# EAGLE board satshakitclsrichardfinal (EAGLE 7.5.0)
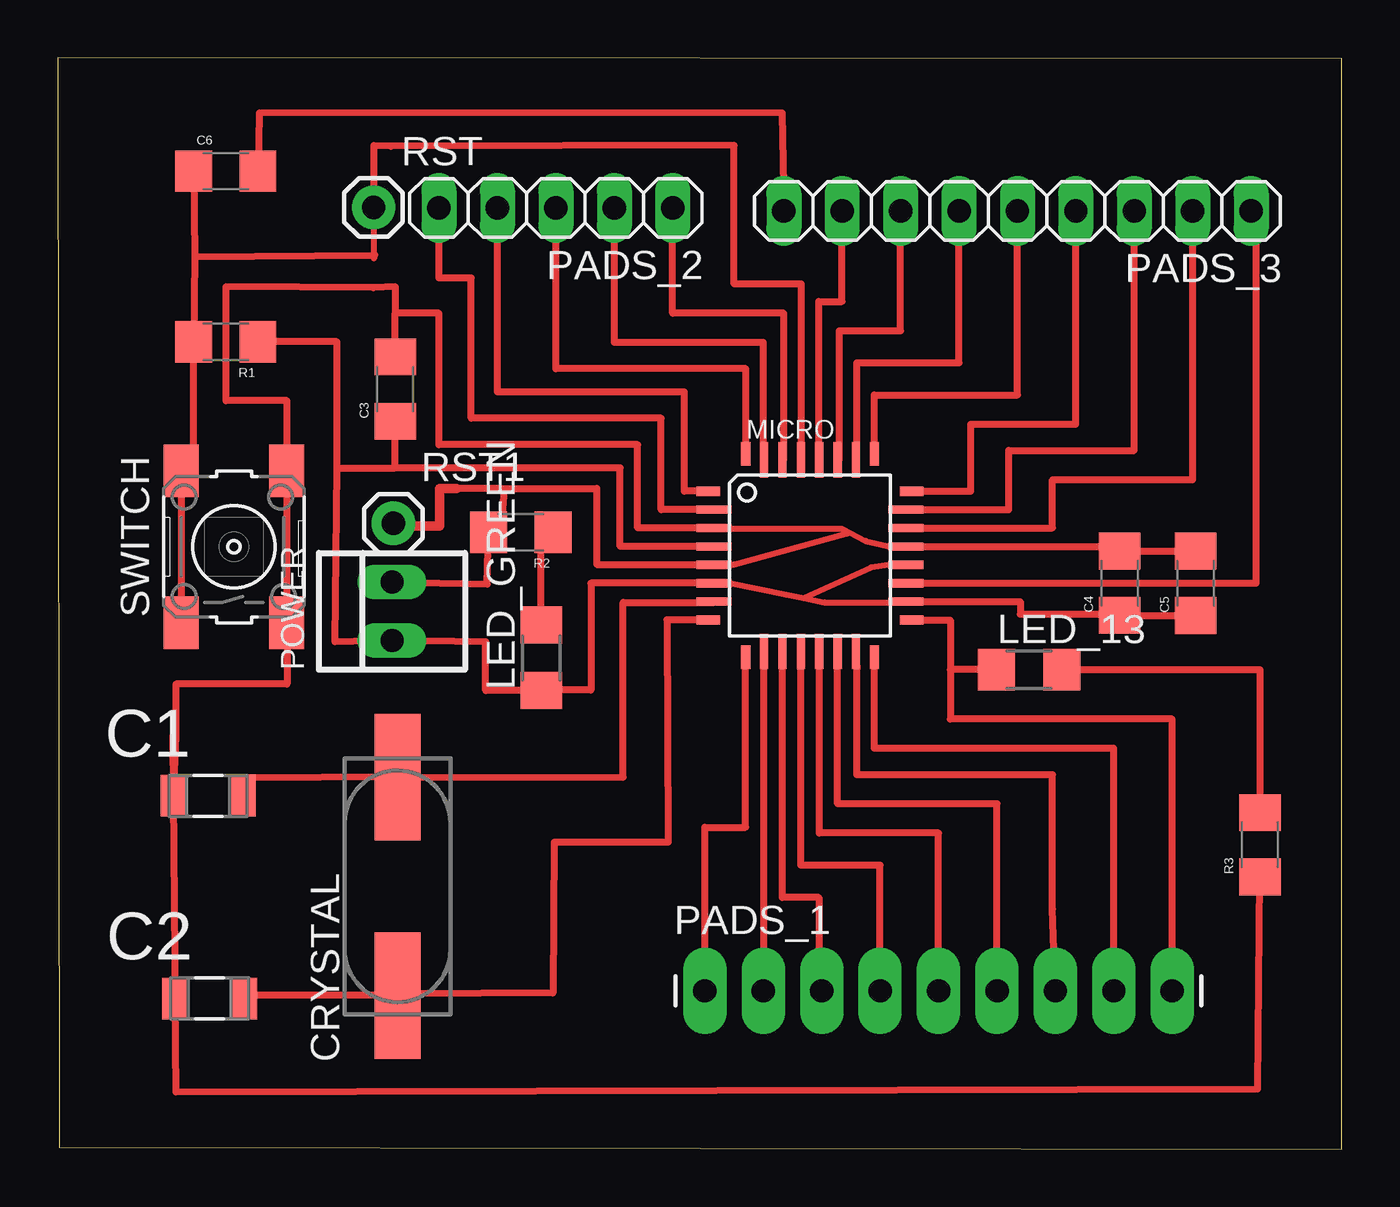
[diagram p0: board, top side]
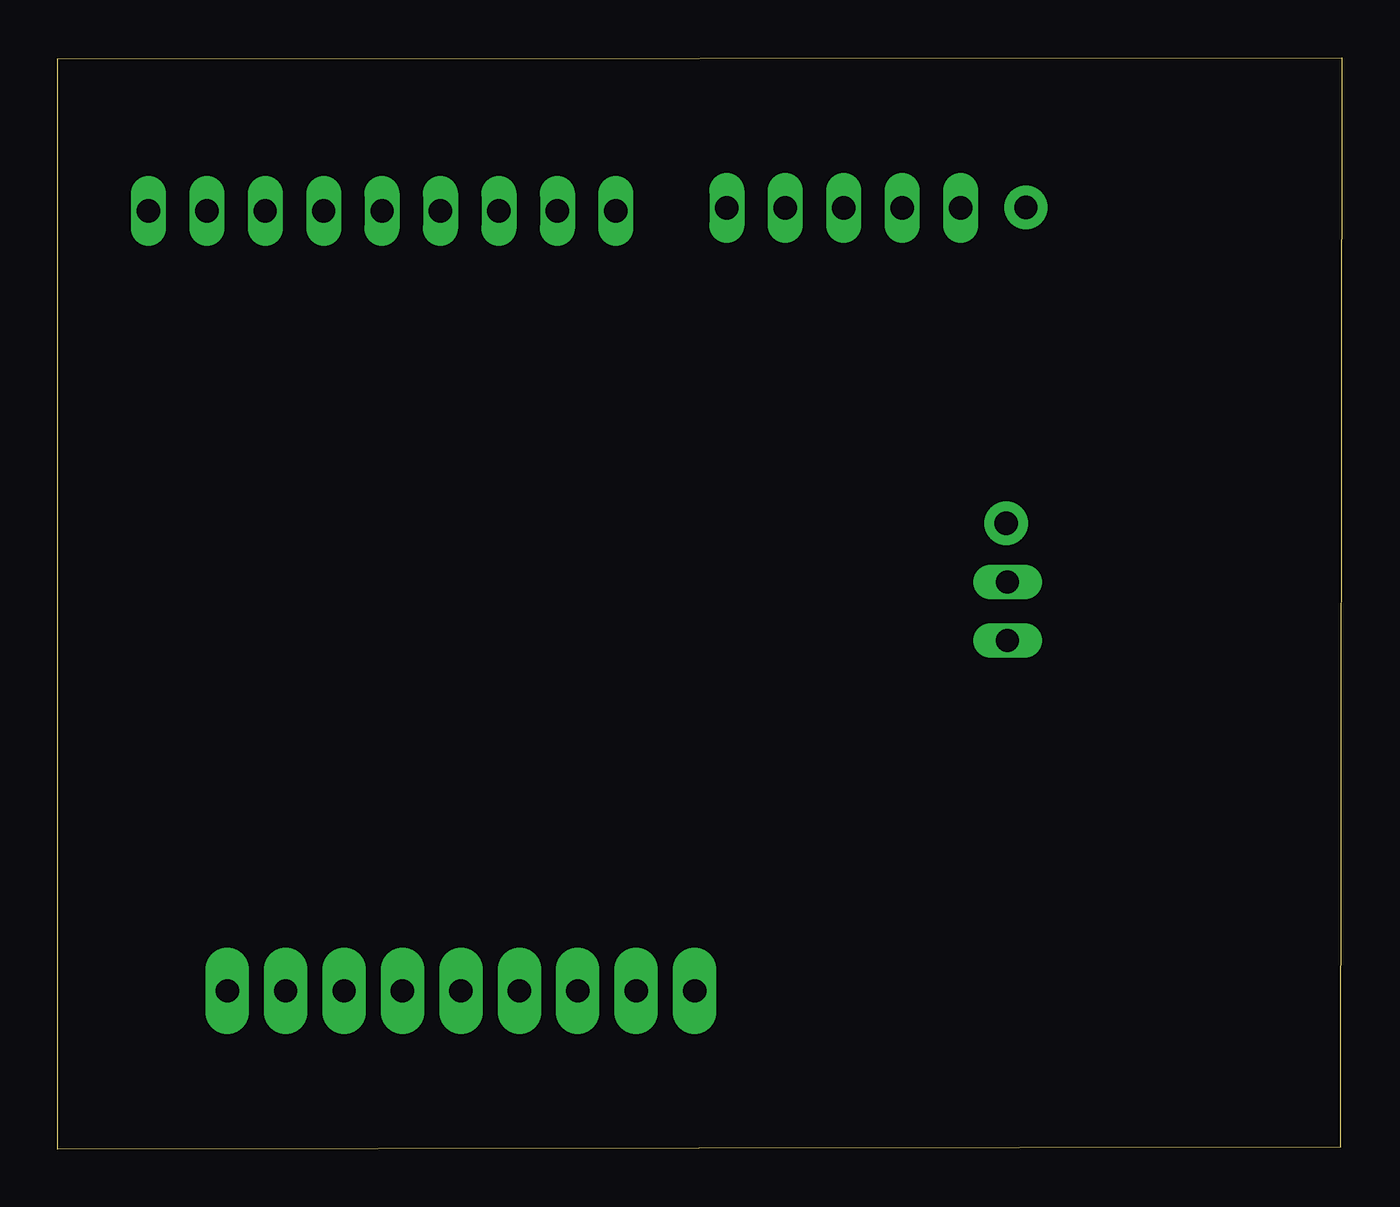
[diagram p1: board, bottom side, seen from below]

Size 55.84 x 47.48 mm. Coordinates in mm from the lower left corner, seen from the top.
Outline: 0.08,0.09 55.83,0 55.84,47.42 0,47.48 0.08,0.09
Copper layers (1*16): Top 0.035mm / dielectric 1.5mm / Bottom 0.035mm
Design rules "default": minimum track width 10mil, minimum drill 24mil, track to track 8mil, track to pad 8mil, pad to pad 8mil, via to via 8mil, smd to smd 8mil, copper to edge 40mil, drill to drill 8mil, minimum pad ring 10mil, minimum via ring 8mil, stop-mask expansion 4mil, vias tented up to drill 0mil, thermal gap 10mil

## Footprints (pad centres in the part's own frame; a part is rotated, then mirrored left to right if it is on the bottom)
CAPC3216X178N = smd 1.118 x 1.803: 1 -1.499,0; 2 1.499,0
1206 = smd 1.6 x 1.8: 1 -1.4,0; 2 1.4,0
CSM-7X-DU = smd 5.5 x 2: 1 -4.75,0; 2 4.75,0
1206' = smd 1.6 x 1.803: 1 -1.422,0; 2 1.422,0
TQFP32-08 = smd 1.016 x 0.406: 1 -4.42,2.8; 8 -4.42,-2.8; 17 4.42,-2.8; 24 4.42,2.8 | smd 1.524 x 0.356: 2 -4.166,2; 3 -4.166,1.2; 4 -4.166,0.4; 5 -4.166,-0.4; 6 -4.166,-1.2; 7 -4.166,-2; 18 4.166,-2; 19 4.166,-1.2; 20 4.166,-0.4; 21 4.166,0.4; 22 4.166,1.2; 23 4.166,2 | smd 0.406 x 1.016: 9 -2.8,-4.42; 16 2.8,-4.42; 25 2.8,4.42; 32 -2.8,4.42 | smd 0.356 x 1.524: 10 -2,-4.166; 11 -1.2,-4.166; 12 -0.4,-4.166; 13 0.4,-4.166; 14 1.2,-4.166; 15 2,-4.166; 26 2,4.166; 27 1.2,4.166; 28 0.4,4.166; 29 -0.4,4.166; 30 -1.2,4.166; 31 -2,4.166
1X09_LONGPADS = drill 1.016 pad 1.88 long: 1 0,0; 2 2.54,0; 3 5.08,0; 4 7.62,0; 5 10.16,0; 6 12.7,0; 7 15.24,0; 8 17.78,0; 9 20.32,0
1X05 = drill 1.016 long: 1 -5.08,0; 2 -2.54,0; 3 0,0; 4 2.54,0; 5 5.08,0
1X09 = drill 1.016 long: 1 -10.16,0; 2 -7.62,0; 3 -5.08,0; 4 -2.54,0; 5 0,0; 6 2.54,0; 7 5.08,0; 8 7.62,0; 9 10.16,0
22-23-2021 = drill 1 long: 1 -1.27,0; 2 1.27,0
1X01 = drill 1.016 pad 1.88: 1 0,0
6MM_SWITCH = smd 2.286 x 1.524: 1 -3.302,2.286; 2 3.302,2.286; 3 -3.302,-2.286; 4 3.302,-2.286

## Placement (x,y rotation side)
C1  22pF  [CAPC3216X178N]  6.55,15.38 0 top
C2  22pF  [CAPC3216X178N]  6.62,6.57 0 top
C3  10uF  [1206]  14.68,33.06 90 top
C4  1uF  [1206]  46.18,24.63 90 top
C5  100nF  [1206]  49.48,24.61 90 top
C6  100nF  [1206]  7.32,42.53 0 top
CRYSTAL  16Mhz  [CSM-7X-DU]  14.78,11.44 90 top
LED_13  YELLOW  [1206']  42.24,20.87 0 top
LED_GREEN  [1206']  21.03,21.37 90 top
MICRO  ATMEGA328P-AU  [TQFP32-08]  32.72,25.82 0 top
PADS_1  M09LONGPADS  [1X09_LONGPADS]  28.14,6.9 0 top
PADS_2  [1X05]  21.67,40.93 180 top
PADS_3  [1X09]  41.73,40.81 180 top
POWER  22-23-2021  [22-23-2021]  14.54,23.39 90 top
R1  10k  [1206]  7.32,35.12 180 top
R2  499  [1206]  20.14,26.84 180 top
R3  499  [1206]  52.27,13.25 90 top
RST  M01PTH  [1X01]  13.74,40.96 0 top
RST1  M01PTH  [1X01]  14.6,27.23 0 top
SWITCH  [6MM_SWITCH]  7.67,26.2 90 top

## Library data of the parts
C1 C2 = AVX_By_element14_Batch_1; MPN: 0612ZC225MAT2A; OC_FARNELL: -; OC_NEWARK: 12N3209; SUPPLIER: AVX; TOLERANCE: ±20%; VOLTAGERATING: 10V
C3-C6 PADS_1 R1-R3 RST RST1 = 01_SparkFun
CRYSTAL = 01_FAB_Hello; OC_FARNELL: unknown; OC_NEWARK: unknown
LED_13 LED_GREEN SWITCH = 01_FAB_Hello
MICRO = atmega8
PADS_2 PADS_3 = pinhead
POWER = con-molex; MF: MOLEX; MPN: 22-23-2021; OC_FARNELL: 1462926; OC_NEWARK: 25C3832

## Nets
GND: C1.1 C2.1 C3.2 C4.2 C5.2 MICRO.3 MICRO.5 MICRO.21 POWER.2 R2.2 R3.1 RST1.1 SWITCH.3 SWITCH.4
N$1: MICRO.9 PADS_1.1
N$2: C1.2 CRYSTAL.2 MICRO.7
N$3: C6.2 PADS_3.9
N$4: MICRO.10 PADS_1.2
N$5: MICRO.11 PADS_1.3
N$6: MICRO.12 PADS_1.4
N$7: MICRO.13 PADS_1.5
N$8: MICRO.14 PADS_1.6
N$9: C2.2 CRYSTAL.1 MICRO.8
N$10: MICRO.15 PADS_1.7
N$11: MICRO.16 PADS_1.8
N$12: LED_13.1 MICRO.17 PADS_1.9
N$13: MICRO.19 PADS_3.1
N$14: MICRO.22 PADS_3.2
N$15: MICRO.23 PADS_3.3
N$16: MICRO.24 PADS_3.4
N$17: MICRO.25 PADS_3.5
N$18: MICRO.26 PADS_3.6
N$19: MICRO.27 PADS_3.7
N$20: MICRO.30 PADS_2.1
N$21: MICRO.31 PADS_2.2
N$22: MICRO.32 PADS_2.3
N$23: MICRO.1 PADS_2.4
N$24: MICRO.2 PADS_2.5
N$25: MICRO.28 PADS_3.8
N$26: LED_GREEN.2 R2.1
N$27: LED_13.2 R3.2
N$28: C6.1 MICRO.29 R1.2 RST.1 SWITCH.1 SWITCH.2
VCC: C3.1 C4.1 C5.1 LED_GREEN.1 MICRO.4 MICRO.6 MICRO.18 MICRO.20 POWER.1 R1.1

## Tracks (layer width: path | path; a pad name or v marks a point on that pad's centre or on a via)
GND  (via drill 0.6)
  Top 0.254: MICRO.3 28.58,26.99 34.1,26.99 | 34.1,26.99 35.13,26.45 36.27,26.2 | 29.16,25.44 29.41,25.44 34.29,26.78 | 34.29,26.78 34.43,26.82 | 34.1,26.99 34.29,26.78
  Top 0.305: MICRO.5 | MICRO.21 | C1.1 5.11,8.32 C2.1 5.16,2.5 52.17,2.63 R3.1 | C1.1 5.03,18 | 19.25,28.74 19.41,28.69 19.25,26.71 R2.2 18.68,24.57 POWER.2 | 19.25,28.74 17.35,28.74 | 19.25,28.74 23.44,28.74 23.44,25.44 28.55,25.44 MICRO.5 | C1.1 5.16,18 5.16,20.23 9.98,20.23 9.98,22.9 | C5.2 C4.2 46.18,26.22 MICRO.21 | 29.16,25.44 MICRO.5 | MICRO.21 36.27,26.2 | MICRO.3 25.22,27.02 25.22,30.65 16.59,30.65 16.59,36.36 14.68,36.36 | C3.2 14.68,36.36 | SWITCH.3 9.98,22.9 | 9.98,22.9 9.98,28.87 9.96,28.87 SWITCH.4 9.98,29.5 9.98,32.55 7.32,32.55 7.32,37.5 13.74,37.47 14.68,37.5 14.68,36.36
  Top 0.406: v14.53,27.33 14.53,27.11 16.61,27.11 16.61,28.74 17.35,28.74
  Bottom 0.406: RST1.1 14.61,27.25 14.76,27.25 14.76,27.33 v14.53,27.33
N$1
  Top 0.305: PADS_1.1 28.14,14.01 29.92,14.01 MICRO.9
N$2
  Top 0.305: 8.05,15.34 C1.2 8.15,16.15 CRYSTAL.2 24.59,16.18 24.59,23.79 28.55,23.79 MICRO.7
N$3
  Top 0.305: PADS_3.9 31.5,45.06 8.78,45.07 C6.2
N$4
  Top 0.305: PADS_1.2 30.72,10.45 MICRO.10
N$5
  Top 0.305: MICRO.11 31.52,10.96 33.1,10.96 33.1,7.53 33.22,7.53 PADS_1.3
N$6
  Top 0.305: 32.33,21.65 MICRO.12 32.32,12.36 35.76,12.36 PADS_1.4
N$7
  Top 0.305: PADS_1.5 38.3,13.75 33.12,13.75 MICRO.13
N$8
  Top 0.305: PADS_1.6 40.84,15.02 33.92,15.02 MICRO.14
N$9
  Top 0.305: 8.1,6.72 C2.2 8.2,6.69 CRYSTAL.1 15.28,6.76 21.54,6.81 21.59,13.36 26.54,13.36 26.49,23.03 MICRO.8
N$10
  Top 0.305: PADS_1.7 43.26,10.45 43.26,16.29 34.75,16.29 34.75,20.87 MICRO.15
N$11
  Top 0.305: MICRO.16 35.52,17.44 45.92,17.44 PADS_1.8
N$12
  Top 0.305: PADS_1.9 48.46,18.71 38.81,18.71 38.81,20.87 | LED_13.1 38.81,20.87 | MICRO.17 38.81,23.02 38.81,20.87
N$13
  Top 0.305: MICRO.19 51.38,24.62 | 51.38,24.62 51.89,24.62 | PADS_3.1 52.1,40.81 52.1,24.61 51.38,24.61 51.38,24.62
N$14
  Top 0.305: MICRO.22 43.26,27.02 43.26,29.12 49.35,29.12 PADS_3.2
N$15
  Top 0.305: MICRO.23 41.35,27.82 41.35,30.39 46.81,30.39 PADS_3.3
N$16
  Top 0.305: MICRO.24 39.7,28.62 39.7,31.53 44.27,31.53 PADS_3.4
N$17
  Top 0.305: MICRO.25 35.51,32.8 41.73,32.8 PADS_3.5
N$18
  Top 0.305: MICRO.26 34.75,29.99 34.75,34.2 39.19,34.2 PADS_3.6
N$19
  Top 0.305: MICRO.27 33.99,29.99 33.99,35.6 36.65,35.6 PADS_3.7
N$20
  Top 0.305: MICRO.30 31.57,29.99 31.57,36.36 26.75,36.36 PADS_2.1
N$21
  Top 0.305: MICRO.31 30.68,29.99 30.68,35.09 24.21,35.09 PADS_2.2
N$22
  Top 0.305: MICRO.32 29.92,33.95 21.67,33.95 PADS_2.3
N$23
  Top 0.305: MICRO.1 27.25,28.62 27.25,32.93 19.13,32.93 PADS_2.4
N$24
  Top 0.305: MICRO.2 26.24,27.82 26.24,31.79 17.98,31.79 17.98,37.88 16.59,37.88 PADS_2.5
N$25
  Top 0.305: MICRO.28 33.1,29.99 33.1,36.87 34.11,36.87 PADS_3.8
N$26
  Top 0.305: 21.92,26.58 R2.1 21.54,26.45 21.03,26.45 LED_GREEN.2
N$27
  Top 0.305: LED_13.2 52.27,20.87 R3.2
N$28
  Top 0.254: 13.79,38.88 13.76,38.75 13.75,43.65
  Top 0.305: MICRO.29 32.33,29.99 32.33,37.63 29.41,37.63 29.41,43.66 14.49,43.61 13.75,43.65 RST.1 | R1.2 5.66,35.12 | R1.2 5.92,29.5 SWITCH.2 SWITCH.1 | C6.1 5.97,38.82 | 5.97,38.82 R1.2 | 5.97,38.82 13.79,38.88
VCC
  Top 0.254: 29.24,24.63 31.69,24.13 32.45,23.97 | 32.45,23.97 33.35,23.79 36.88,23.79 | MICRO.20 36.27,25.42 36.27,25.44 35.38,25.31 32.45,23.97
  Top 0.305: MICRO.18 | MICRO.20 36.27,25.44 | MICRO.4 24.46,26.22 24.46,29.63 14.68,29.63 | 12.14,29.63 12.14,35.12 R1.1 | 12.14,29.63 12.05,22.07 POWER.1 18.62,22.07 18.62,19.95 LED_GREEN.1 21.03,19.98 23.19,19.98 23.19,24.62 MICRO.6 29.24,24.63 | 36.88,23.79 MICRO.18 | MICRO.18 41.86,23.82 41.86,23.28 46.18,23.28 C4.1 C5.1 | 12.14,29.63 14.68,29.63 | 14.68,29.63 C3.1 15.06,31.66 15.06,31.41